# EAGLE board EveryCookPWR (EAGLE 6.4)
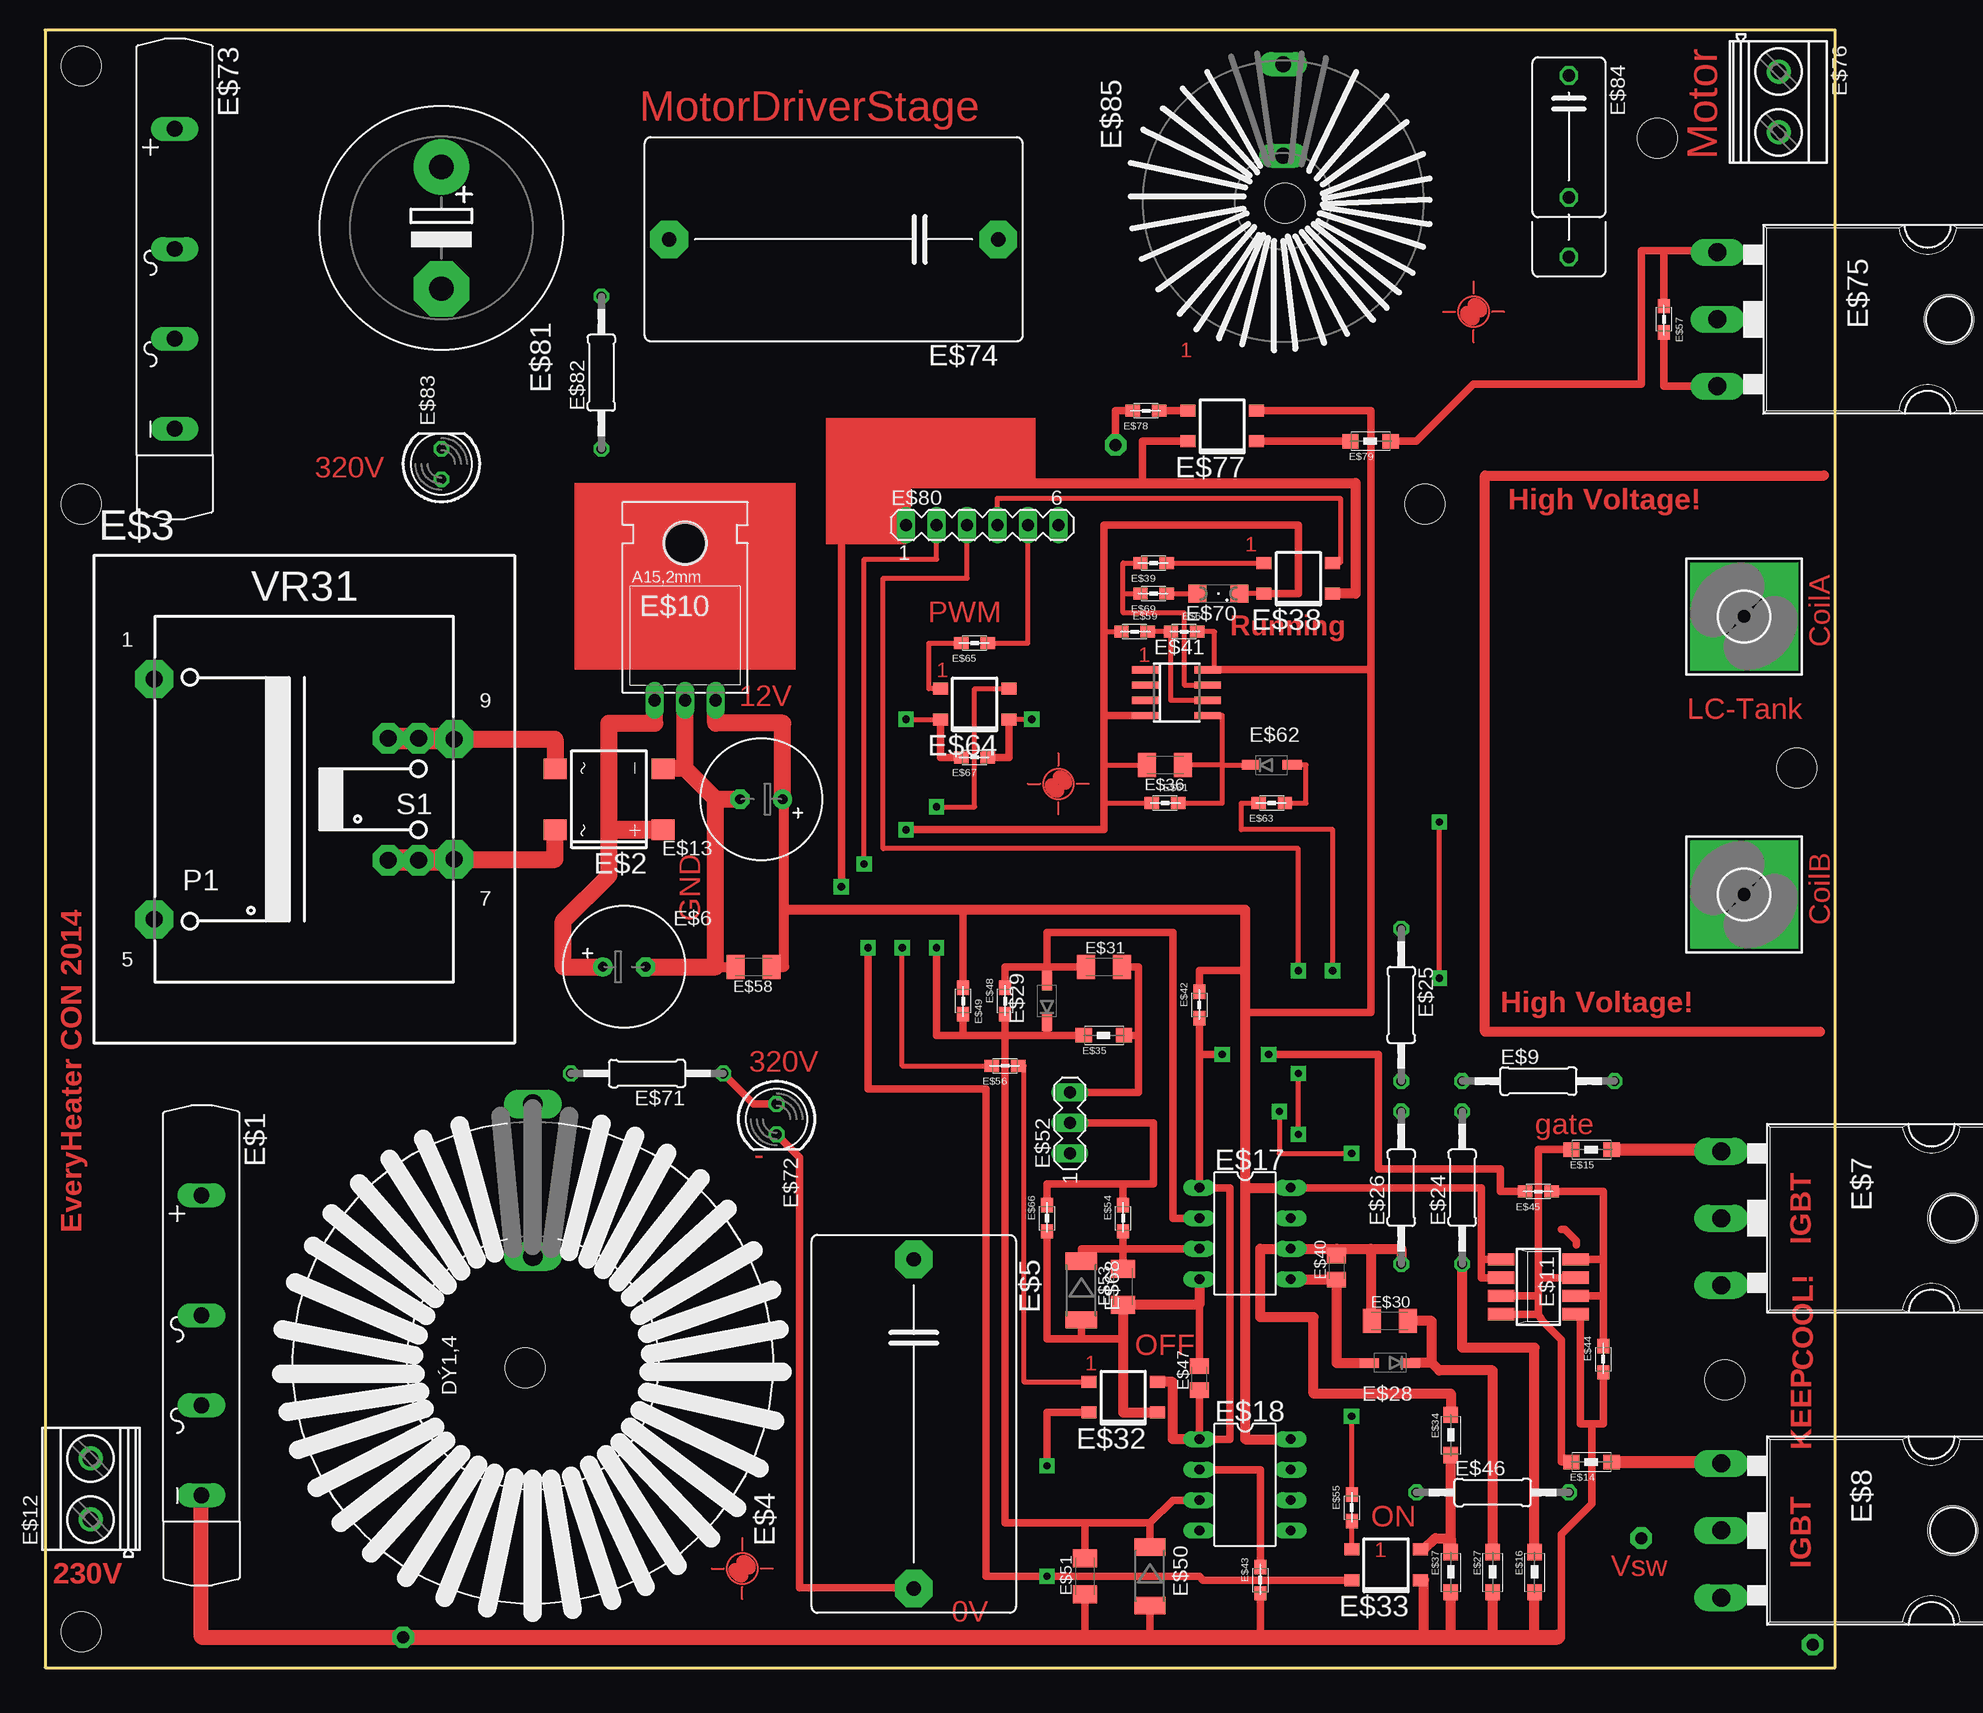
[diagram p0: board, top side]
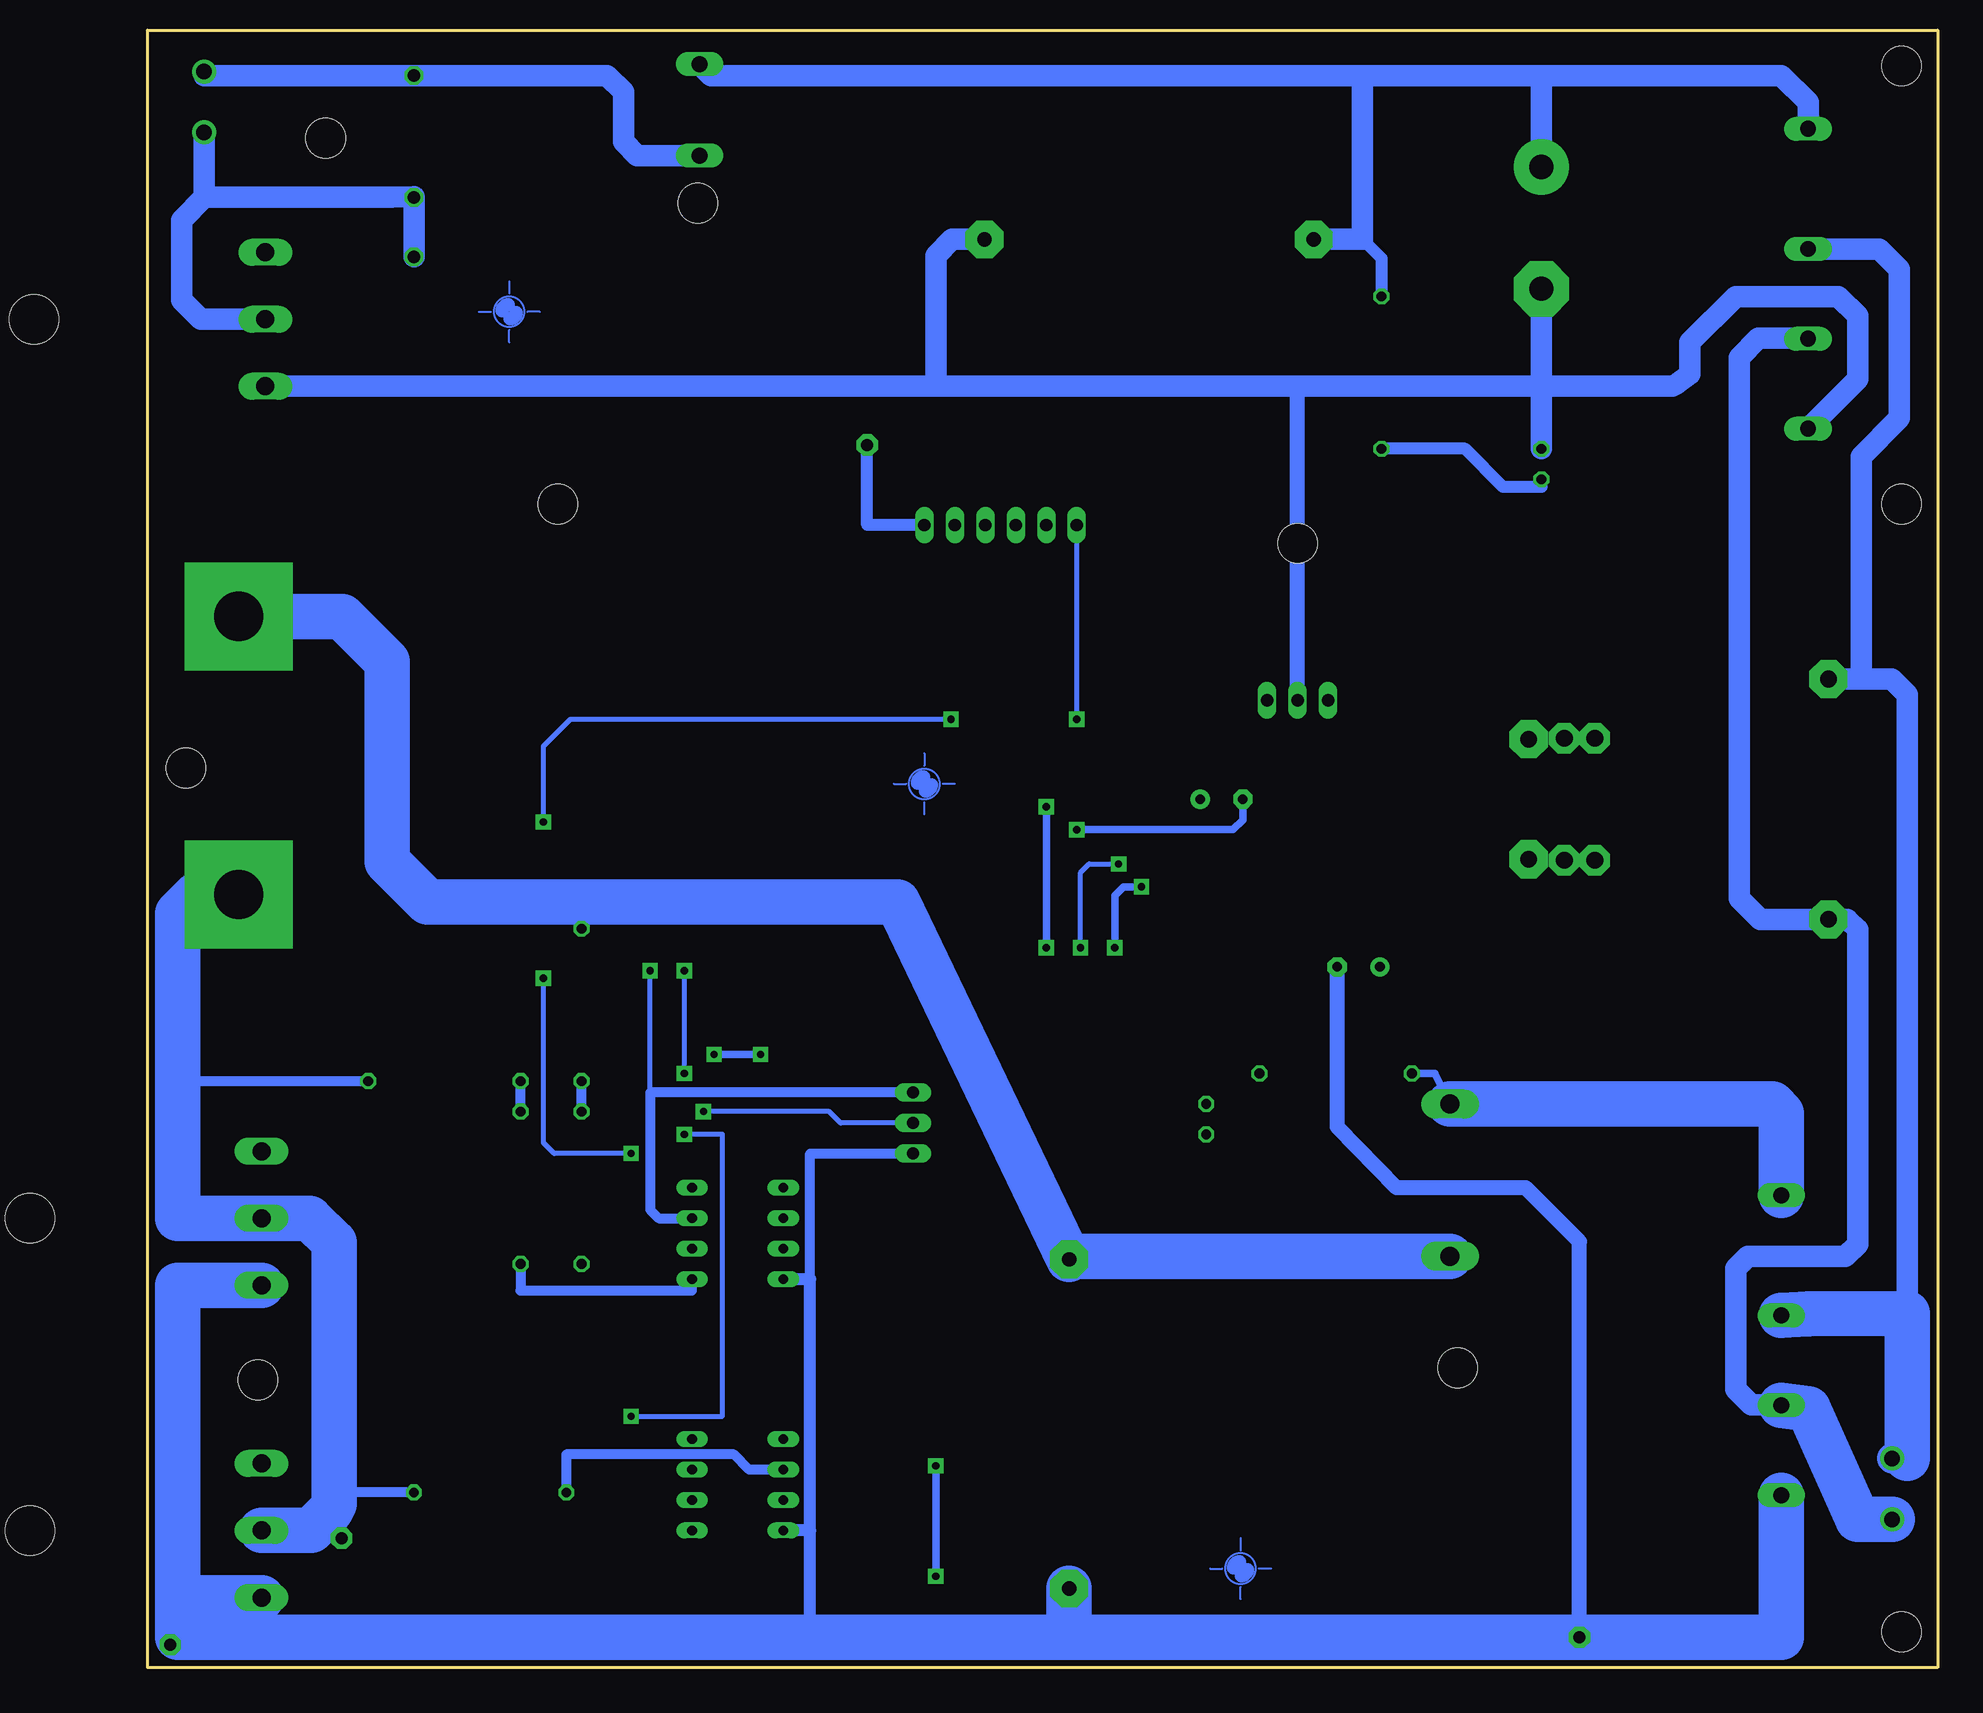
[diagram p1: board, bottom side, seen from below]

Size 149.21 x 136.51 mm. Coordinates in mm from the lower left corner, seen from the top.
Outline: 0,0 149.21,0 149.21,136.51 0,136.51 0,0
Copper layers (1*16): Top 0.035mm / dielectric 1.5mm / Bottom 0.035mm
Design rules "default": minimum track width 10mil, minimum drill 24mil, track to track 8mil, track to pad 8mil, pad to pad 8mil, via to via 8mil, smd to smd 8mil, copper to edge 40mil, drill to drill 8mil, minimum pad ring 10mil, minimum via ring 8mil, stop-mask expansion 4mil, vias tented up to drill 0mil, thermal gap 10mil
Holes 3.3 mm at 3,3 3,97 115,97 40,25 146,75 140,24 3,133.51 103.33,122.08 134.37,127.48

## Footprints (pad centres in the part's own frame; a part is rotated, then mirrored left to right if it is on the bottom)
SKB50 = drill 1.321 long: + -13.97,0; - 11.024,0; AC1 -3.962,0; AC2 3.531,0
DBS = smd 1.7 x 1.9: + -2.55,-4.5; - 2.55,-4.5; AC1 -2.55,4.5; AC2 2.55,4.5
VR31 = drill 1.397 pad 3.175 octagon: 1 -12.497,10.008; 5 -12.497,-10.008; 7 12.497,-5.004; 9 12.497,5.004
ED43 = drill 1.6 long: 1 -21.59,0; 2 -8.89,0
C27.5B17 = drill 1.194 pad 3.15 octagon: 1 -13.716,0; 2 13.716,0
E3,5-10 = drill 0.813 pad 1.6: + -1.778,0 | drill 0.813 pad 1.6 octagon: - 1.778,0
TO247BH = drill 1.499 long: D 0,-10.16; G -5.588,-10.16; S 5.588,-10.16 | hole 4.115: 0,9.144
0207/12 = drill 0.813 octagon: 1 -6.35,0; 2 6.35,0
78XXL_S = drill 1.016 long: GND 0,-1.905; IN -2.54,-1.905; OUT 2.54,-1.905 | hole 3.302: 0,11.176
SM8 = smd 1.016 x 2.235: 1 -2.286,-3.099; 2 -0.762,-3.099; 3 0.762,-3.099; 4 2.286,-3.099; 5 2.286,3.099; 6 0.762,3.099; 7 -0.762,3.099; 8 -2.286,3.099
MKDSN1,5/2-5,08 = drill 1.3 pad 2: 1 -2.561,0.025; 2 2.519,0.025
1206 = smd 1.35 x 1.2: 1 -1.7,0; 2 1.65,0
DIL8 = drill 0.813 long: 1 -3.81,-3.81; 2 -1.27,-3.81; 3 1.27,-3.81; 4 3.81,-3.81; 5 3.81,3.81; 6 1.27,3.81; 7 -1.27,3.81; 8 -3.81,3.81
4,1-PAD-SQUARE = drill 4.1 pad 9 square: B4,1 0,0
SOD123 = smd 1.6 x 0.8: 1 -1.7,0; 2 1.7,0
C1206K = smd 1.5 x 2: 1 -1.5,0; 2 1.5,0
TO-269AA = smd 1 x 1.25: + -1.28,-2.855; - 1.28,-2.855; AC1 -1.28,2.855; AC2 1.28,2.855
0805 = smd 1.2 x 1: 1 -1.1,0; 2 1.1,0
C0805K = smd 1.3 x 1.6: 1 -1,0; 2 1,0
SO8 = smd 0.6 x 2.2: 1 -1.905,-2.6; 2 -0.635,-2.6; 3 0.635,-2.6; 4 1.905,-2.6; 5 1.905,2.6; 6 0.635,2.6; 7 -0.635,2.6; 8 -1.905,2.6
MELF-MLL41 = smd 1.45 x 2.6: 1 -2.445,0; 2 2.445,0
MA03-1 = drill 1.016 long: 1 -2.54,0; 2 0,0; 3 2.54,0
SML1206 = smd 1.5 x 1.5: A 1.75,0; C -1.75,0
LED5MM = drill 0.813 octagon: A -1.27,0; K 1.27,0
MA06-1 = drill 1.016 long: 1 -6.35,0; 2 -3.81,0; 3 -1.27,0; 4 1.27,0; 5 3.81,0; 6 6.35,0
EB20D = drill 2.007 pad 4.597: + -5.08,0 | drill 2.007 pad 4.597 octagon: - 5.08,0
C102_152-062X184 = drill 1.016 octagon: 1 -5.08,0; 2 5.08,0; 3 10.033,0
L-160 = drill 1.321 long: 1 -11.43,0; 2 -3.81,0

## Placement (x,y rotation side)
E$1  GBI25M  [SKB50]  13.02,25.4 270 top
E$2  [DBS]  46.99,72.39 90 top
E$3  [VR31]  21.59,72.39 0 top
E$4  330uH (SDO-40-5.00-330)  [ED43]  40.64,25.4 270 top
E$5  6.8uF (B32674D4685K000)  [C27.5B17]  72.39,20.32 270 top
E$6  220uF  [E3,5-10]  48.26,58.42 0 top
E$7  FGA25120N  [TO247BH]  149.86,37.47 270 top
E$8  FGA25120N  [TO247BH]  149.86,11.43 270 top
E$9  300k  [0207/12]  124.46,48.9 0 top
E$10  7812  [78XXL_S]  53.34,82.55 0 top
E$11  ZDT6790  [SM8]  124.46,31.75 270 top
E$12  [MKDSN1,5/2-5,08]  3.81,14.92 90 top
E$13  220uF  [E3,5-10]  59.69,72.39 180 top
E$14  10  [1206]  128.91,17.14 0 top
E$15  10  [1206]  128.91,43.18 0 top
E$16  6k8  [1206]  124.14,7.94 270 top
E$17  LM2903N  [DIL8]  100.01,36.2 270 top
E$18  LM2903N  [DIL8]  100.01,15.24 270 top
E$19  [4,1-PAD-SQUARE]  141.6,64.45 90 top
E$20  [4,1-PAD-SQUARE]  141.6,87.63 90 top
E$21  [PASS-ROUND]  58.1,8.26 0 top
E$22  [PASS-ROUND]  84.45,73.66 0 top
E$23  [PASS-ROUND]  119.06,113.03 0 top
E$24  300k  [0207/12]  118.11,40.01 90 top
E$25  330k  [0207/12]  113.03,55.24 270 top
E$26  330k  [0207/12]  113.03,40.01 90 top
E$27  22k  [1206]  120.65,7.94 270 top
E$28  [SOD123]  112.08,25.4 180 top
E$29  [SOD123]  83.5,55.56 90 top
E$30  1n  [C1206K]  112.08,28.89 0 top
E$31  2nF  [C1206K]  88.27,58.42 0 top
E$32  HCPL181  [TO-269AA]  89.85,22.54 90 top
E$33  HCPL181  [TO-269AA]  111.76,8.57 90 top
E$34  1k  [1206]  117.16,19.37 270 top
E$35  1k  [1206]  88.27,52.7 0 top
E$36  1uF  [C1206K]  93.34,75.25 180 top
E$37  8k2  [1206]  117.16,7.94 270 top
E$38  HCPL181  [TO-269AA]  104.46,90.81 90 top
E$39  1k  [0805]  92.39,92.08 0 top
E$40  150p  [C0805K]  107.63,33.34 90 top
E$41  LMV6482  [SO8]  94.3,81.28 270 top
E$42  4k7  [0805]  96.2,55.24 270 top
E$43  4k7  [0805]  101.28,7.3 270 top
E$44  10k  [0805]  129.86,25.72 270 top
E$45  470  [0805]  124.46,39.69 0 top
E$46  680k  [0207/12]  120.65,14.61 0 top
E$47  150p  [C0805K]  96.2,24.13 90 top
E$48  22k  [0805]  80.01,55.56 270 top
E$49  270  [0805]  76.52,55.56 90 top
E$50  Z5.1  [MELF-MLL41]  92.08,7.62 270 top
E$51  10uF  [C1206K]  86.68,7.62 90 top
E$52  [MA03-1]  85.41,45.4 90 top
E$53  10uF  [C1206K]  89.85,31.75 90 top
E$54  4k7  [0805]  89.85,37.47 270 top
E$55  1k  [0805]  108.9,13.34 270 top
E$56  1k  [0805]  80.01,50.16 0 top
E$57  4k7  [0805]  134.94,112.39 90 top
E$58  1uF  [C1206K]  59.05,58.42 180 top
E$59  1k  [0805]  90.81,86.36 180 top
E$60  10k  [0805]  94.93,86.36 180 top
E$61  22k  [0805]  93.34,72.07 180 top
E$62  [SOD123]  102.23,75.25 0 top
E$63  10k  [0805]  102.23,72.07 0 top
E$64  HCPL181  [TO-269AA]  77.47,80.33 90 top
E$65  1k  [0805]  77.47,85.41 0 top
E$66  10k  [0805]  83.5,37.47 270 top
E$67  4k7  [0805]  77.47,75.88 0 top
E$68  Z5.1  [MELF-MLL41]  86.36,31.43 270 top
E$69  1k  [0805]  92.39,89.53 0 top
E$70  [SML1206]  97.79,89.53 180 top
E$71  100k  [0207/12]  50.16,49.53 180 top
E$72  [LED5MM]  60.96,45.72 270 top
E$73  GBI25M  [SKB50]  10.79,114.3 270 top
E$74  6.8uF (B32674D4685K000)  [C27.5B17]  65.72,119.06 180 top
E$75  FGA25120N  [TO247BH]  149.54,112.39 270 top
E$76  [MKDSN1,5/2-5,08]  144.46,130.49 270 top
E$77  HCPL181  [TO-269AA]  98.11,103.5 90 top
E$78  1k  [0805]  91.76,104.78 0 top
E$79  100  [1206]  110.49,102.23 0 top
E$80  [MA06-1]  78.11,95.25 0 top
E$81  47uF  [EB20D]  33.02,120.02 270 top
E$82  100k  [0207/12]  46.35,107.95 90 top
E$83  [LED5MM]  33.02,100.33 90 top
E$84  [C102_152-062X184]  127,127.64 270 top
E$85  [L-160]  103.19,122.24 270 top

## Library data of the parts
E$1 E$2 E$32 E$33 E$38 E$64 E$73 E$77 = rectifier
E$3 = trafo
E$4 = inductors
E$5 E$74 = capacitor-wima
E$6 E$9 E$13 E$24-E$26 E$46 E$71 E$82 E$84 = rcl
E$7 E$8 E$50 E$68 E$75 = ref-packages
E$10 = v-reg
E$11 = zetex
E$12 E$76 = con-phoenix-508
E$14-E$16 E$27 E$34 E$35 E$37 E$39 E$42-E$45 E$48 E$49 E$54-E$57 E$59-E$61 E$63 E$65-E$67 E$69 E$78 E$79 = wuerth-elektronik
E$17 E$18 = on-semiconductor
E$19 E$20 = holes
E$21-E$23 = marks
E$28 E$29 E$62 E$81 = ref-packages-longpad
E$30 E$31 E$36 E$40 E$47 E$51 E$53 E$58 = resistor
E$41 = resistor-bourns
E$52 E$80 = con-lstb
E$70 E$72 E$83 = led
E$85 = special

## Nets
S$1: E$1.AC1 E$3.1 E$12.2 E$73.AC1
S$2: E$3.5 E$73.AC2
S$3: E$9.1 E$24.2
S$4: E$1.+ E$4.1 E$71.2
S$5: E$4.2 E$5.1 E$20.B4,1 E$25.1
S$6: E$2.AC2 E$3.9
S$7: E$2.AC1 E$3.7
S$8: E$65.2 E$80.5
S$9: E$2.+ E$6.+ E$10.IN
S$10: E$16.1 E$17.5 E$24.1 E$28.2 E$40.1
S$11: E$7.G E$15.2
S$12: E$7.D E$8.D E$9.2 E$19.B4,1 E$46.2
S$13: E$8.G E$14.2
S$14: E$11.3 E$11.4 E$11.7 E$14.1 E$15.1
S$15: E$11.6 E$11.8 E$44.1 E$45.2
S$16: E$10.OUT E$11.1 E$11.2 E$13.+ E$17.8 E$18.8 E$41.8 E$42.1 E$49.2 E$58.1 E$60.1 E$77.-
S$17: E$25.2 E$26.2
S$18: E$27.1 E$28.1 E$30.2
S$19: E$17.6 E$26.1 E$30.1 E$34.1 E$40.2
S$20: E$33.- E$34.2 E$37.1
S$21: E$17.1 E$18.1 E$32.- E$42.2 E$45.1 E$47.1
S$22: E$41.6 E$59.1 E$60.2
S$23: E$18.2 E$43.1 E$46.1
S$24: E$17.2 E$29.2 E$31.1 E$48.1
S$25: E$18.3 E$29.1 E$35.1 E$48.2 E$49.1 E$50.1 E$51.2 E$64.-
S$26: E$17.3 E$53.2 E$54.2 E$68.1
S$27: E$32.AC1 E$33.AC1 E$38.+ E$64.AC1 E$67.1 E$77.AC1 E$80.1
S$28: E$33.AC2 E$55.2
S$29: E$32.AC2 E$56.2
S$30: E$55.1 E$80.3
S$31: E$17.7 E$31.2 E$35.2 E$52.3 E$63.1
S$32: E$52.2 E$54.1 E$64.+ E$66.1 E$67.2
S$33: E$56.1 E$80.2
S$34: E$38.- E$80.4
S$36: E$38.AC2 E$39.2
S$37: E$39.1 E$41.7 E$69.1
S$38: E$1.- E$2.- E$5.2 E$6.- E$7.S E$8.S E$10.GND E$11.5 E$13.- E$16.2 E$17.4 E$18.4 E$27.2 E$32.+ E$33.+ E$36.2 E$37.2 E$38.AC1 E$41.4 E$43.2 E$44.2 E$47.2 E$50.2 E$51.1 E$52.1 E$53.1 E$57.1 E$58.2 E$59.2 E$61.2 E$66.2 E$68.2 E$70.C E$72.K E$73.- E$74.1 E$75.S E$81.- E$83.K
S$39: E$36.1 E$41.5 E$61.1 E$62.1
S$40: E$62.2 E$63.2
S$41: E$64.AC2 E$65.1
S$47: E$69.2 E$70.A
S$48: E$71.1 E$72.A
S$52: E$73.+ E$74.2 E$81.+ E$82.2 E$85.1
S$53: E$77.+ E$79.1
S$54: E$57.2 E$75.G E$79.2
S$55: E$1.AC2 E$12.1
S$56: E$77.AC2 E$78.2
S$57: E$78.1 E$80.6
S$58: E$82.1 E$83.A
S$60: E$75.D E$76.2 E$84.2 E$84.3
S$61: E$76.1 E$84.1 E$85.2

## Tracks (layer width: path | path; a pad name or v marks a point on that pad's centre or on a via)
S$1
  Bottom 1.778: 2.54,29.53 2.54,81.11 3.83,82.4 6.35,82.4 | 6.35,82.4 E$3.1 | E$73.AC1 4.86,118.26 3.17,116.58 3.17,104.14 6.35,100.97 6.35,82.4
  Bottom 2.54: E$12.2 2.54,17.44
  Bottom 3.81: E$1.AC1 10.79,29.51 2.54,29.53 2.54,17.44
S$2
  Bottom 1.778: E$73.AC2 11.43,110.81 14.92,110.81 16.51,109.22 16.51,64.11 14.79,62.38 E$3.5 7.52,62.38 6.67,61.53 6.67,35.29 7.67,34.29 15.82,34.29 16.83,33.29 16.83,23.22 15.52,21.91 13.02,21.91
S$3
  Bottom 0.813: E$24.2 E$9.1
S$4
  Bottom 0.61: E$71.2 41.91,49.53 E$4.1
  Bottom 3.81: E$1.+ 13.02,46.22 13.79,46.99 E$4.1
S$5
  Bottom 0.813: 113.03,63.82 E$25.1
  Bottom 1.778: 72.39,34.29 E$5.1
  Bottom 3.81: E$4.2 72.39,34.29 | E$20.B4,1 133,87.63 129.22,83.85 129.22,67.19 125.85,63.82 113.03,63.82 86.68,63.82 E$5.1
S$6
  Top 1.422: E$3.9 42.49,77.39 E$2.AC2
S$7
  Top 1.422: E$3.7 42.49,67.39 E$2.AC1
S$8
  Top 0.406: E$65.2 81.92,85.41 E$80.5
S$9
  Top 1.422: E$6.+ 43.18,58.42 43.18,62.23 46.99,66.04 46.99,69.84 E$2.+ 46.99,69.85 46.99,78.74 50.8,78.74 E$10.IN
S$10
  Top 0.813: E$16.1 124.14,26.67 118.11,26.67 E$24.1 | E$17.5 107.63,32.38 E$40.1 107.63,25.4 E$28.2
  Bottom 0.813: E$17.5 103.82,31.43 118.11,31.43 E$24.1
S$11
  Top 1.016: E$15.2 139.7,43.18 E$7.G
S$12
  Bottom 0.813: 146.69,48.9 E$9.2 | E$46.2 133.67,14.61
  Bottom 3.81: E$19.B4,1 145.1,64.45 146.69,62.87 146.69,48.9 146.69,37.47 E$7.D 135.7,37.47 133.67,35.43 133.67,14.61 133.67,13.65 133.99,13.02 135.57,11.43 E$8.D
S$13
  Top 1.016: E$14.2 139.7,17.14 E$8.G
S$14
  Top 0.61: E$14.1 126.36,17.14 126.36,27.3 124.78,28.89 124.46,29.46 | E$15.1 124.46,43.18 124.46,32.51 | 124.46,30.99 E$11.3 | 124.46,29.46 E$11.4 | 124.46,29.46 124.46,30.99 | 124.46,32.51 E$11.7 | 124.46,30.99 124.46,32.51
S$15
  Top 0.61: E$45.2 129.86,39.69 129.86,34.04 | E$44.1 129.86,30.99 | 129.86,34.04 E$11.8 | 129.86,30.99 E$11.6 | 129.86,30.99 129.86,34.04
S$16
  Top 0.406: E$60.1 97.47,86.36 97.47,83.19
  Top 0.61: E$42.1 96.2,58.1 100.01,58.1 | 76.52,63.18 E$49.2 | 110.49,83.19 97.47,83.19 E$41.8 | 110.49,83.19 110.49,54.61 100.01,54.61 | E$17.8 119.7,40.01 119.7,34.04 | E$11.2 119.7,32.51 119.7,34.04 | 119.7,34.04 E$11.1 | E$77.- 110.49,104.78 110.49,83.19
  Top 0.813: 100.01,40.01 E$17.8 | 100.01,40.01 100.01,19.05 E$18.8 | 61.59,63.18 76.52,63.18 100.01,63.18 100.01,58.1 100.01,54.61 100.01,40.01 | 61.59,63.18 61.59,72.39 E$13.+ | E$58.1 61.59,58.42 61.59,63.18
  Top 1.422: E$10.OUT 55.88,78.74 61.47,78.74 E$13.+
S$17
  Bottom 0.813: E$26.2 E$25.2
S$18
  Top 0.813: E$30.2 115.57,28.89 115.57,25.4 | 115.57,25.4 E$28.1 | E$27.1 120.65,24.77 116.2,24.77 115.57,25.4
S$19
  Top 0.813: 107.63,34.92 E$40.2 | 107.63,34.92 E$17.6 101.28,34.92 101.28,29.21 105.73,29.21 105.73,22.86 117.16,22.86 E$34.1 | E$26.1 113.03,34.92 110.49,34.92 | 107.63,34.92 110.49,34.92 | E$30.1 110.49,28.89 110.49,34.92
S$20
  Top 0.813: 117.16,10.79 E$37.1 | 117.16,10.79 E$34.2 | E$33.- 114.94,9.85 115.89,10.79 117.16,10.79
S$21  (via drill 0.6 pad 1.27)
  Top 0.61: 96.2,51.12 E$17.1 98.74,40.01 98.74,19.05 E$18.1 E$47.1 | 96.2,51.12 E$42.2 | 96.2,51.12 v98.11,51.12 98.31,51.12 | v101.98,51.12 111.12,51.12 111.12,41.59 121.28,41.59 121.28,39.69 E$45.1
  Top 0.813: E$32.- 93.98,23.82 93.98,19.05 E$18.1
  Bottom 0.61: v98.11,51.12 v101.98,51.12
S$22
  Top 0.406: E$59.1 E$60.2 93.83,80.64 E$41.6
S$23
  Top 0.61: E$43.1 101.28,16.51 E$18.2
  Bottom 0.813: E$46.1 114.3,17.78 100.33,17.78 99.06,16.51 E$18.2
S$24
  Top 0.61: 83.5,58.42 80.01,58.42 E$48.1 | 83.5,58.42 E$31.1 | 83.5,58.42 E$29.2 | E$17.2 93.98,37.47 93.98,61.28 83.5,61.28 83.5,58.42
S$25  (via drill 0.6 pad 1.27)
  Top 0.406: E$64.- 77.47,81.61 77.47,71.75 v74.3,71.75
  Top 0.61: 80.01,52.7 83.5,52.7 | 80.01,52.7 E$48.2 | 83.5,52.7 E$29.1 | 76.52,52.7 E$49.1 | 80.01,52.7 76.52,52.7 | 86.68,12.06 92.08,12.06 | 92.08,12.06 93.98,13.97 E$18.3 | 80.01,52.7 80.01,12.06 86.68,12.06 | 83.5,52.7 E$35.1 | 86.68,12.06 E$51.2 | 92.08,12.06 E$50.1 | v74.3,60.01 74.3,52.7 76.52,52.7
  Bottom 0.61: v74.3,60.01 v74.3,71.75
S$26
  Top 0.61: 89.85,34.92 E$17.3 | 89.85,34.92 E$53.2 | 89.85,34.92 E$54.2 | E$68.1 86.36,34.92 89.85,34.92
S$27  (via drill 0.6 pad 1.27)
  Top 0.406: E$64.AC1 71.75,79.05 v71.75,79.06
  Top 0.61: E$67.1 74.61,75.88 E$64.AC1 | E$77.AC1 91.44,102.22 91.44,98.74 | E$80.1 66.36,95.25 v66.36,65.09 | E$32.AC1 83.5,21.26 v83.5,16.83 | E$33.AC1 96.52,7.29 96.2,7.62 v83.5,7.62 78.42,7.62 78.42,48.26 68.58,48.26 v68.58,60.01
  Top 0.813: E$38.+ 109.22,89.53 109.22,98.74 91.44,98.74 71.75,98.74 E$80.1
  Bottom 0.406: E$80.1 v71.75,79.06
  Bottom 0.61: v66.36,65.09 67.87,65.09 68.58,64.38 v68.58,60.01 | v83.5,7.62 v83.5,16.83
S$28
  Top 0.406: E$33.AC2 E$55.2
S$29
  Top 0.406: E$56.2 81.6,50.16 81.6,23.81 86.68,23.81 E$32.AC2
S$30  (via drill 0.6 pad 1.27)
  Top 0.406: E$55.1 v108.9,20.95 | v104.46,44.45 v104.46,49.53 | v104.46,58.1 104.46,68.26 69.85,68.26 69.85,90.81 76.83,90.81 E$80.3
  Bottom 0.406: v108.9,20.95 101.28,20.95 101.28,44.45 v104.46,44.45 | v104.46,49.53 v104.46,58.1
S$31  (via drill 0.6 pad 1.27)
  Top 0.406: E$63.1 99.69,72.07 99.69,69.85 107.31,69.85 v107.31,58.1
  Top 0.61: E$31.2 91.12,58.42 91.12,52.7 | 91.12,52.7 E$35.2 | E$52.3 91.12,47.94 91.12,52.7
  Bottom 0.406: 107.31,47.94 v107.31,58.1
  Bottom 0.813: E$17.7 106.61,37.47 107.31,38.17 107.31,47.94 E$52.3
S$32  (via drill 0.6 pad 1.27)
  Top 0.406: E$64.+ 82.23,79.05 v82.23,79.06 | v116.2,57.47 v116.2,70.48 | v108.9,42.86 102.87,42.86 v102.87,46.35
  Top 0.61: E$67.2 80.33,75.88 E$64.+ | E$52.2 92.39,45.4 92.39,40.32 89.85,40.32 | 89.85,40.32 E$54.1 | 89.85,40.32 83.5,40.32 E$66.1
  Bottom 0.406: v116.2,70.48 116.2,76.81 113.96,79.06 v82.23,79.06 | v108.9,42.86 115.31,42.86 116.2,43.76 v116.2,57.47 | v102.87,46.35 92.39,46.35 91.44,45.4 E$52.2
S$33  (via drill 0.6 pad 1.27)
  Top 0.406: E$80.2 74.3,92.39 68.26,92.39 v68.26,66.99 | v71.44,60.01 71.44,50.16 E$56.1
  Bottom 0.406: v71.44,60.01 71.44,66.28 70.73,66.99 v68.26,66.99
S$34
  Top 0.406: E$80.4 79.38,97.47 107.95,97.47 107.95,92.08 107.63,92.08 E$38.-
S$35
  Top 0.813: 147.96,53.02 120.02,53.02 120.02,99.38 148.27,99.38
S$36
  Top 0.406: E$39.2 101.6,92.08
  Top 0.61: 101.6,92.08 E$38.AC2
S$37
  Top 0.406: E$41.7 94.93,81.92 94.93,87.95 89.85,87.95 89.85,89.53 | 89.85,89.53 89.85,92.08 E$39.1 | 89.85,89.53 E$69.1
S$38  (via drill 0.6 pad 1.27, 1 pad 1.78)
  Top 0.406: 88.27,86.36 E$59.2 | 88.27,72.07 E$61.2 | 88.27,75.25 E$36.2 | E$53.1 89.85,27.39 | E$70.C E$38.AC1
  Top 0.61: 126.05,2.54 126.36,2.54 126.36,11.11 128.91,13.65 128.91,20.32 | 128.91,20.32 129.86,20.32 E$44.2 | 128.91,20.32 127.95,20.32 127.95,29.46 E$11.5 | 101.28,2.54 E$43.2 | 96.2,30.25 E$47.2 | 86.68,2.54 E$51.1 | 92.08,2.54 E$50.2 | v71.75,69.85 88.27,69.85 88.27,72.07 88.27,75.25 88.27,79.38 | 88.27,79.38 E$41.4 | 88.27,79.38 88.27,86.36 88.27,95.25 104.46,95.25 104.46,89.53 E$38.AC1 | 89.85,27.39 86.36,27.39 | 86.36,27.39 83.5,27.39 E$66.2 | 86.36,27.39 E$68.2 | E$72.K 62.87,42.55 62.87,6.67 72.39,6.67 E$5.2 | E$57.1 134.94,106.81 E$75.S
  Top 0.813: 124.14,2.54 E$16.2 | 120.65,2.54 E$27.2 | 117.16,2.54 E$37.2 | E$17.4 96.2,30.25 E$53.1 89.85,21.26 E$32.+ | E$33.+ 114.94,7.29 114.94,2.54 | 55.88,58.42 E$58.2
  Top 1.27: E$1.- 13.02,2.54 v29.84,2.54 86.68,2.54 92.08,2.54 101.28,2.54 114.94,2.54 117.16,2.54 120.65,2.54 124.14,2.54 126.05,2.54
  Top 1.422: E$6.- 55.88,58.42 55.88,72.39 | 55.88,72.39 53.34,74.94 | 55.88,72.39 E$13.- | 53.34,74.94 E$2.- | 53.34,74.94 E$10.GND
  Bottom 0.61: E$13.- 57.91,70.66 58.73,69.85 v71.75,69.85
  Bottom 0.813: E$52.1 93.98,42.86 93.98,32.38
  Bottom 1.016: 93.98,11.43 E$18.4 | 93.98,2.54 93.98,11.43 | E$17.4 93.98,32.38 93.98,11.43
  Bottom 1.27: v29.84,2.54 29.84,35.52 34.34,40.01 45.09,40.01 50.04,45.09 E$6.- | 83.5,106.81 53.34,106.81 E$10.GND
  Bottom 1.778: 83.5,106.81 E$75.S | 83.5,106.81 83.5,117.72 82.16,119.06 E$74.1 | 33.02,106.81 22.1,106.81 21.78,107 20.64,107.83 20.64,110.48 16.81,114.3 8.26,114.3 6.67,112.71 6.67,107.4 E$73.- | 83.5,106.81 33.02,106.81 | 33.02,106.81 E$81.- | 33.02,106.81 E$83.K
  Bottom 3.81: E$1.- 13.02,2.54 v29.84,2.54 72.39,2.54 | 72.39,2.54 E$5.2 | E$7.S 146.69,31.88 146.69,5.84 | 146.69,5.84 E$8.S | 146.69,5.84 146.69,2.54 93.98,2.54 72.39,2.54
S$39
  Top 0.406: E$61.1 98.11,72.07 98.11,75.25 | 98.11,75.25 E$36.1 | E$41.5 98.11,79.38 98.11,75.25 | 98.11,75.25 E$62.1
S$40
  Top 0.406: E$62.2 105.09,75.25 105.09,72.07 E$63.2
S$41
  Top 0.406: E$65.1 73.66,85.41 73.66,81.6 73.98,81.6 E$64.AC2
S$42  (via drill 1.4 pad 2.54)
  other vias: 31.11,67.31
S$43  (via drill 1.4 pad 2.54)
  other vias: 28.57,67.31
S$44  (via drill 1.4 pad 2.54)
  other vias: 31.11,77.47
S$45  (via drill 1.4 pad 2.54)
  Top 1.778: v28.57,77.47 34.29,77.47
S$46
  Top 1.778: 28.26,67.31 34.29,67.31
S$47
  Top 0.406: E$69.2 E$70.A
S$48
  Top 0.61: E$71.1 59.05,46.99 E$72.A
S$49  (via drill 1 pad 1.78)
  other vias: 147.32,1.91
S$50  (via drill 1 pad 1.78)
  other vias: 133.03,10.79
S$51
  Top 0.61: 126.36,36.51 126.68,36.51 127.64,35.56 127.64,35.24
S$52
  Bottom 1.016: E$82.2 46.35,117.47 47.94,119.06
  Bottom 1.778: E$74.2 47.94,119.06 47.94,132.72 | E$85.1 102.23,132.72 47.94,132.72 | 33.02,132.72 47.94,132.72 | 33.02,132.72 E$81.+ | E$73.+ 10.79,130.49 13.02,132.72 33.02,132.72
S$53
  Top 0.61: E$77.+ E$79.1
S$54
  Top 0.61: E$79.2 114.3,102.23 119.06,107 133.03,107 133.03,118.11 134.94,118.11 | 134.94,118.11 139.38,118.11 E$75.G | 134.94,118.11 E$57.2
S$55
  Bottom 3.81: E$1.AC2 10.79,21.59 6.67,12.38 E$12.1
S$56
  Top 0.61: E$78.2 93.98,104.78 E$77.AC2
S$57  (via drill 1 pad 1.78)
  Top 0.61: v89.22,101.92 89.22,104.78 E$78.1
  Bottom 1.016: E$80.6 89.22,95.25 v89.22,101.92
S$58
  Bottom 1.016: E$83.A 33.02,98.42 36.2,98.42 39.37,101.6 E$82.1
S$60
  Bottom 1.778: 144.46,126.07 E$76.2 144.46,127.97 144.46,126.07 | 144.46,122.56 146.37,120.65 146.37,113.98 144.78,112.39 E$75.D | E$84.2 E$84.3 127,122.61 128.85,122.56 144.46,122.56 | 144.46,122.56 144.46,126.07
S$61
  Bottom 1.778: E$85.2 108.39,126.05 109.54,127.19 109.54,131.37 110.89,132.72 E$84.1 144.49,132.72 E$76.1
(copper drawn outside any net)
  shapes: Top area x5

## Text on the board
Top: MotorDriverStage | Motor | 1 | 320V | High Voltage! | 1 | CoilA | PWM | Running | 1 | 1 | 12V | LC-Tank | CoilB | EveryHeater CON 2014 | GND | High Voltage! | 320V | gate | - | IGBT | COOL! | OFF | 1 | KEEP | IGBT | ON | 1 | Vsw | 230V | 0V
Document: GND | < OFF | < ON | > RUN (NPN) | < POWER (PWM) | <PWM Motor
tDocu: FREQ. | Uramp | GND